# Altium PCB PCB 0901.PcbDoc (part 1 of 3)
Units mm, origin at the board's own origin, x right, y up, seen from the top; angles counter-clockwise.
Board outline 234.06 x 185.93 mm, 2 copper layers (Top Layer, Bottom Layer); 162 components, 256 nets, 1015 pads, 205 vias.
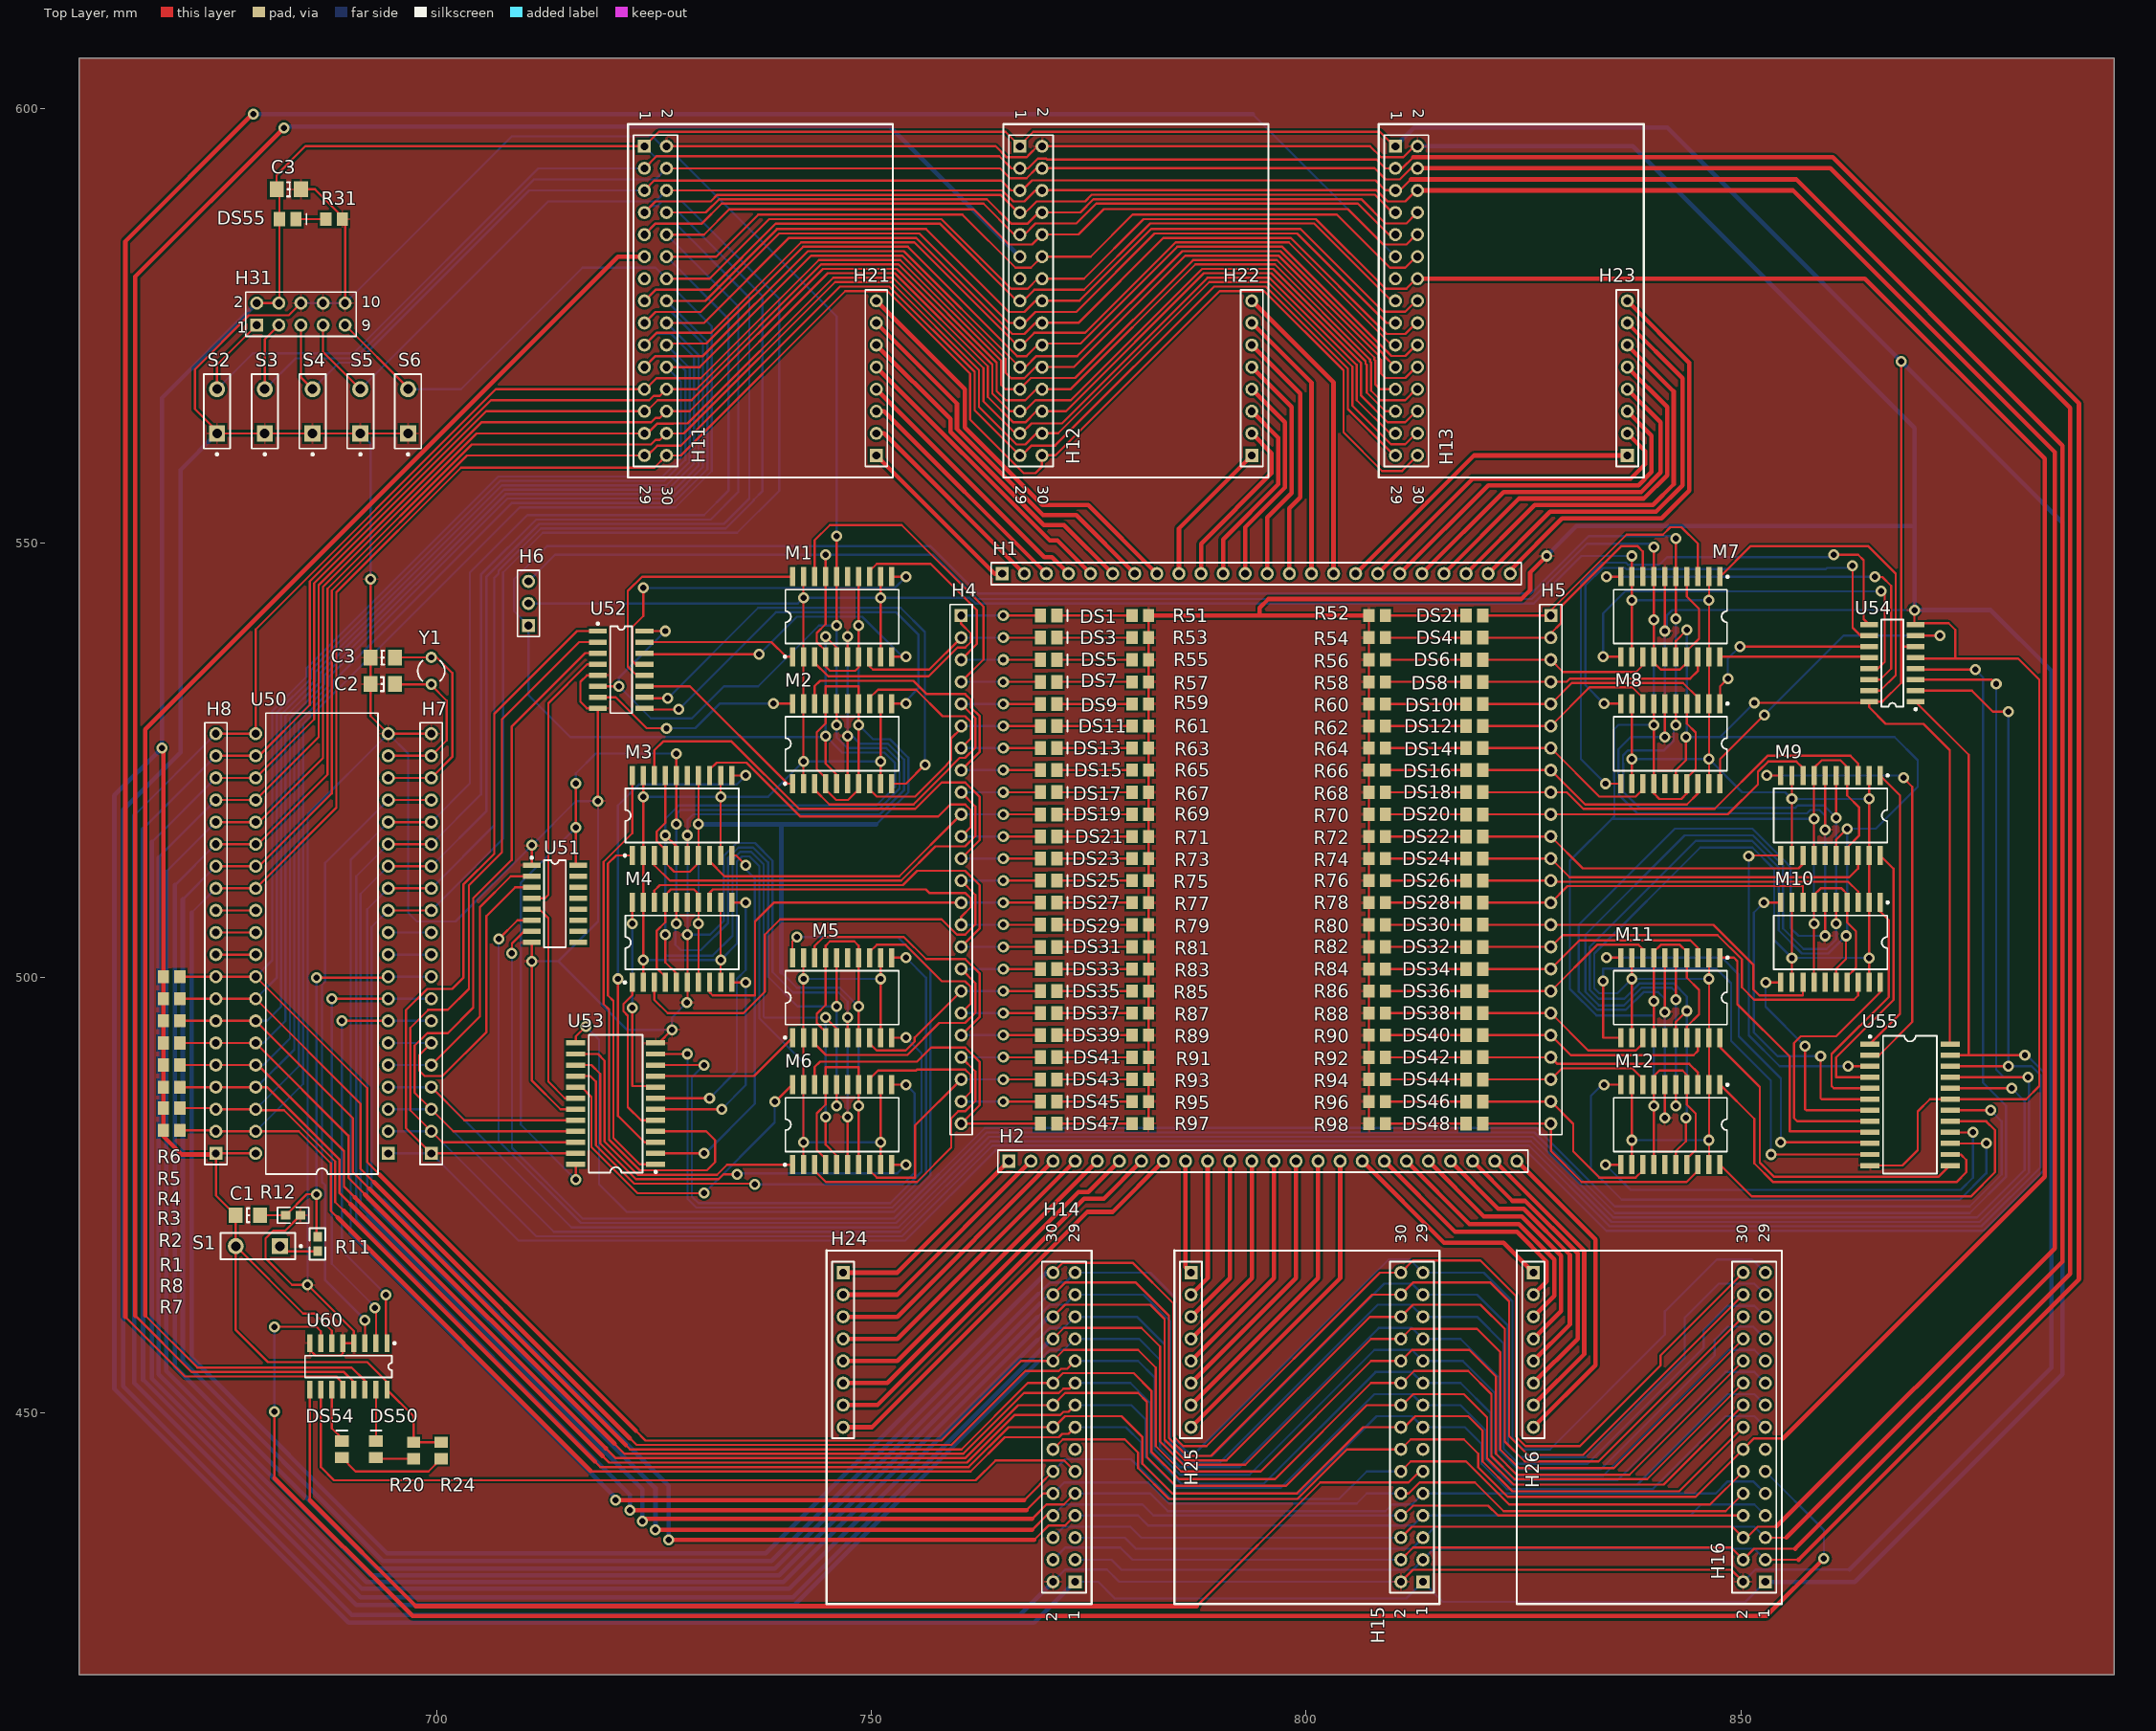
[diagram p0: Top Layer view]
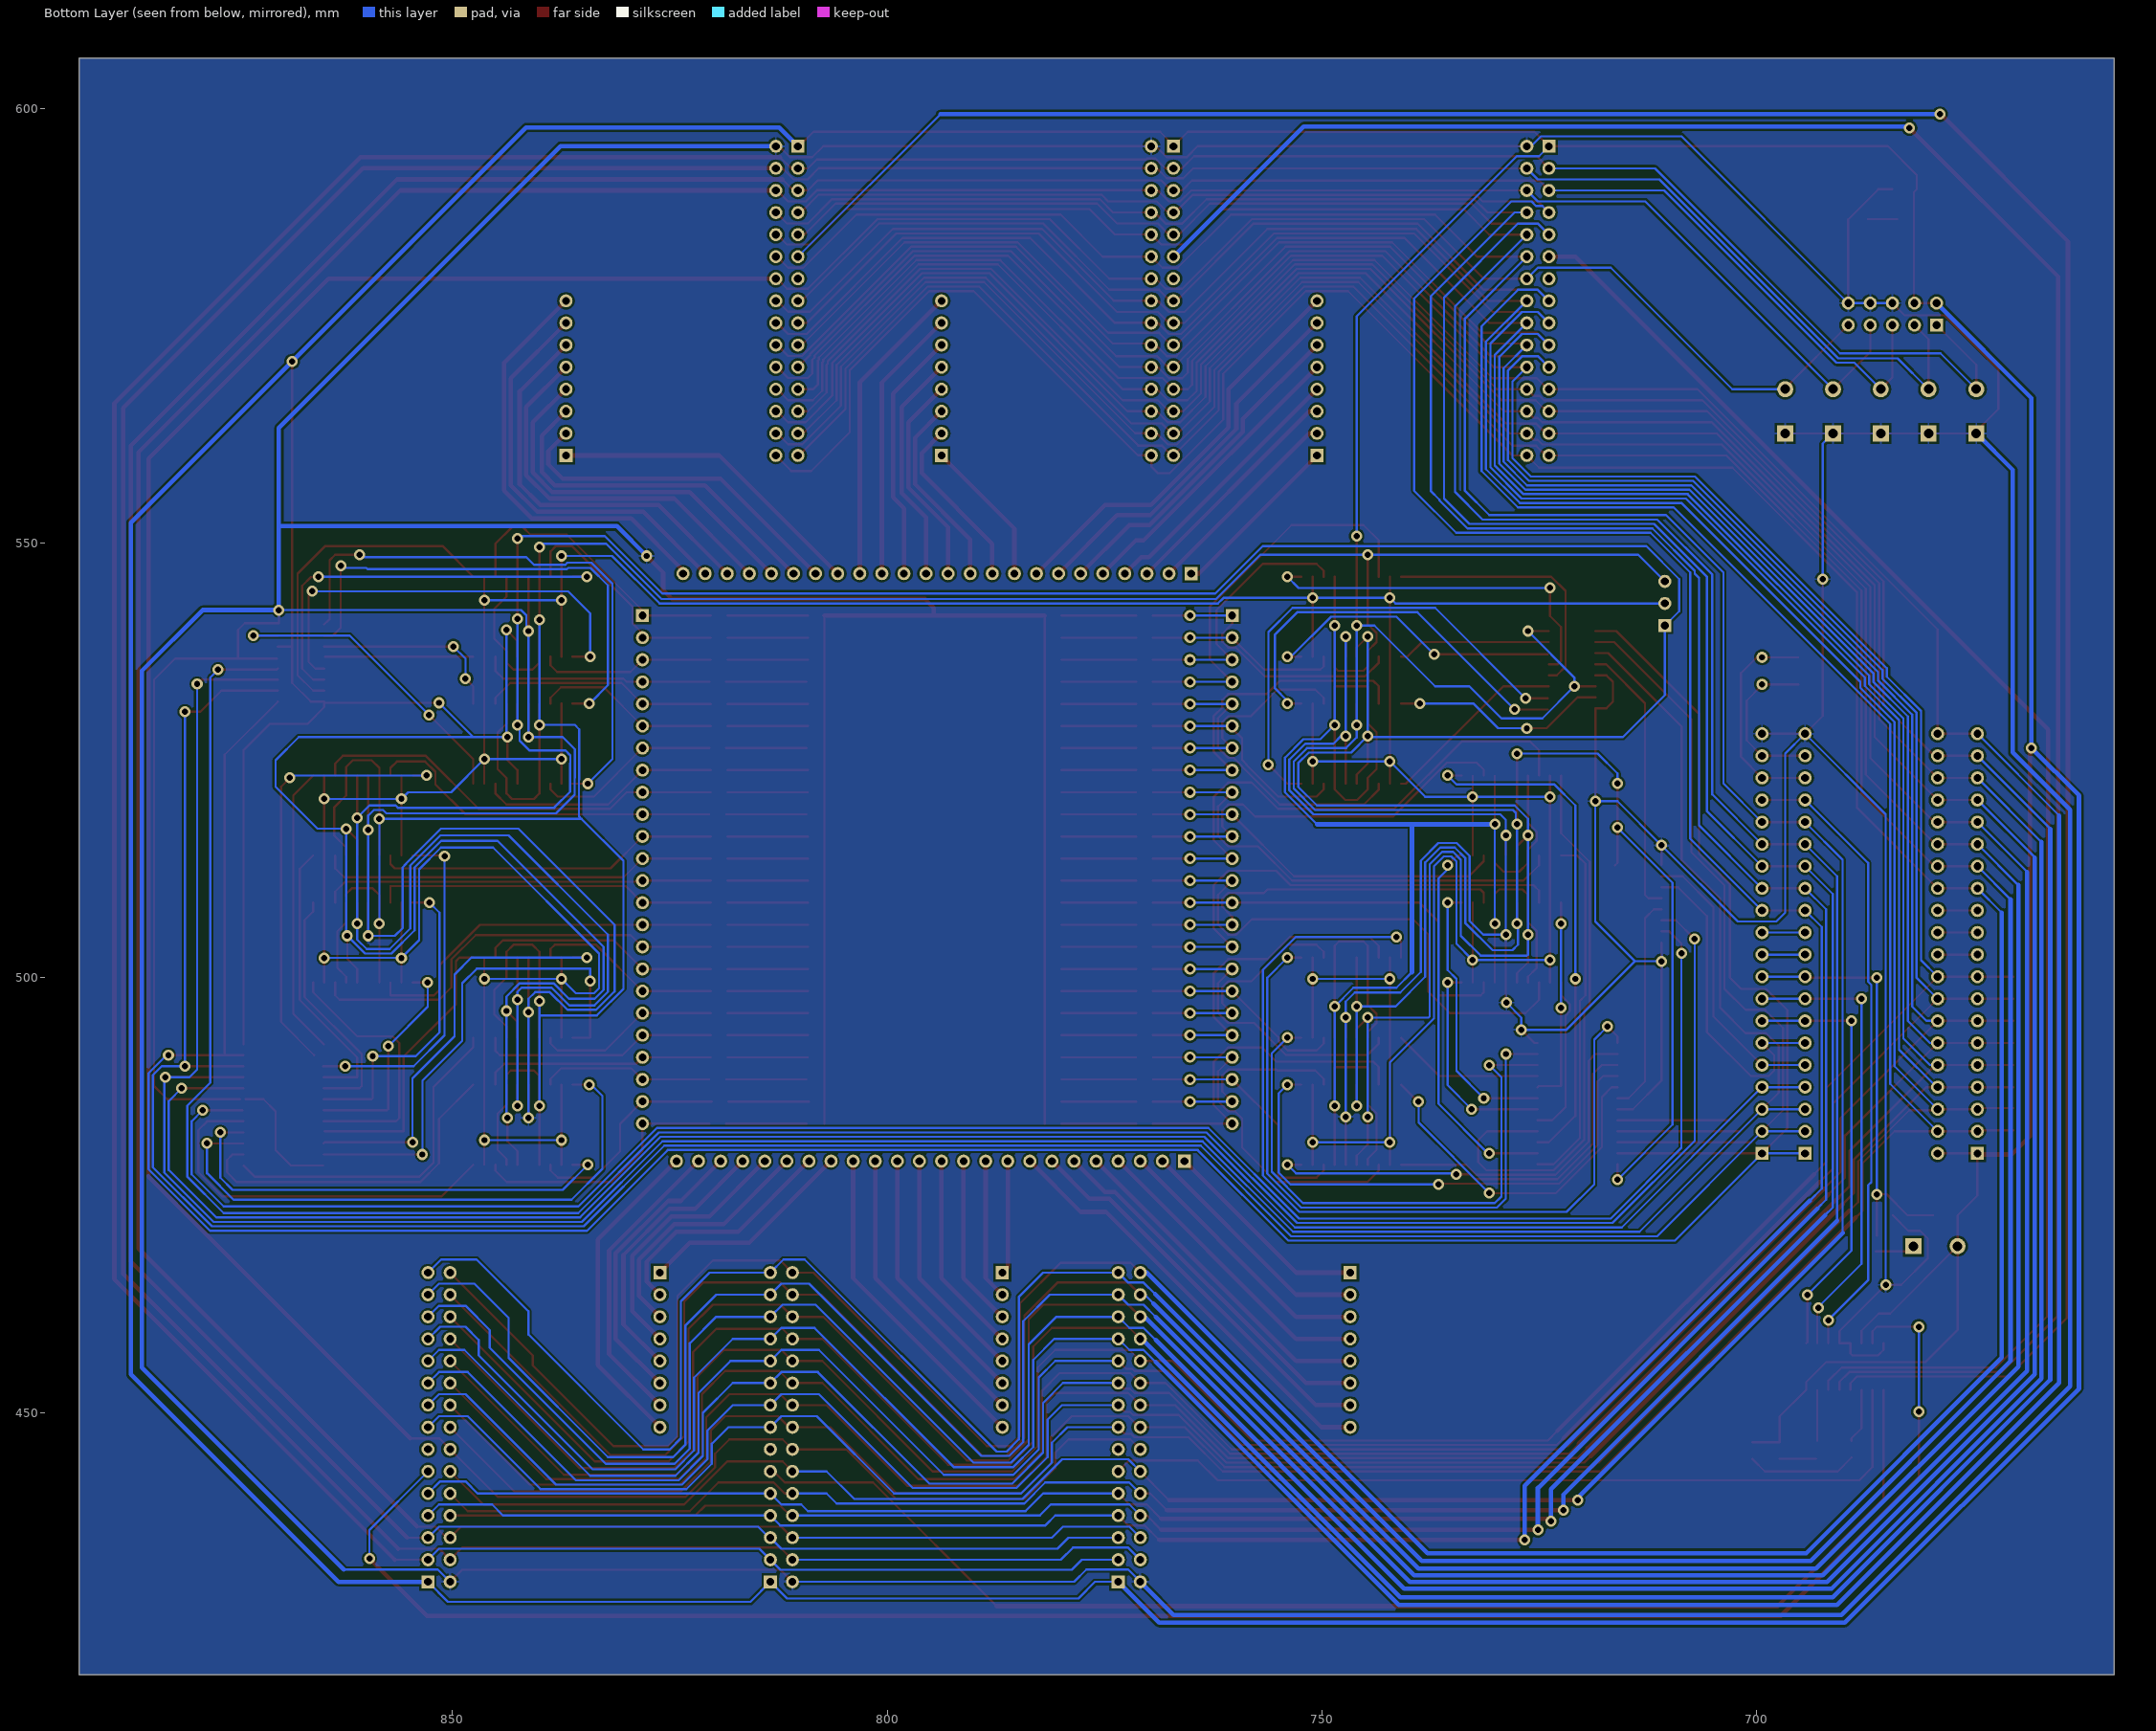
[diagram p1: Bottom Layer view, seen from below]

## Layer stack, top to bottom
Top Layer: signal copper 0.0356
Dielectric: dielectric 0.32, FR-4, Dk 4.8
Bottom Layer: signal copper 0.0356

## Board outline
658.876,419.862 658.876,605.79 892.937,605.79 892.937,419.862

## Design rules (kind name [scope] priority, off if disabled: settings)
Clearance Clearance_1 [All] p1: gap=0.254
Clearance [All] p2: gap=0.254
PolygonConnect [All] p1: connectstyle=Relief reliefconductorwidth=0.254 reliefentries=4 polygonreliefangle="90 Angle"
RoutingVias [All] p1: holewidth=0.711 width=1.27 viastyle="Through Hole" minholewidth=0.711 minwidth=1.27 maxholewidth=0.711 maxwidth=1.27
SilkscreenOverComponentPads [All] p1: minsilkscreentomaskgap=0.254
SolderMaskExpansion [All] p1: expansion=0.102
Width [All] p1: maxlimit=1.254 minlimit=0.254 preferedwidth=0.254
27 further rules are at their usual default settings.

## Components (designator, comment, footprint, x,y, rotation, side; value= is the part's Value field where it differs from the comment)
C1 "Cap Semi" CC3216-1206 678.304,472.694 r0 top
C2 "Cap Semi" CC3216-1206 693.801,533.781 r180 top
C3 "Cap Semi" CC3216-1206 683.006,590.677 r180 top
C3 "Cap Semi" CC3216-1206 693.801,536.829 r0 top
DS1 "LED3" "SMD _LED" 770.382,541.655 r180 top
DS2 "LED3" "SMD _LED" 819.343,541.655 r0 top
DS3 "LED3" "SMD _LED" 770.382,539.115 r180 top
DS4 "LED3" "SMD _LED" 819.343,539.115 r0 top
DS5 "LED3" "SMD _LED" 770.382,536.575 r180 top
DS6 "LED3" "SMD _LED" 819.343,536.575 r0 top
DS7 "LED3" "SMD _LED" 770.382,534.035 r180 top
DS8 "LED3" "SMD _LED" 819.343,534.035 r0 top
DS9 "LED3" "SMD _LED" 770.382,531.495 r180 top
DS10 "LED3" "SMD _LED" 819.343,531.495 r0 top
DS11 "LED3" "SMD _LED" 770.382,528.955 r180 top
DS12 "LED3" "SMD _LED" 819.343,528.955 r0 top
DS13 "LED3" "SMD _LED" 770.382,526.415 r180 top
DS14 "LED3" "SMD _LED" 819.343,526.415 r0 top
DS15 "LED3" "SMD _LED" 770.382,523.875 r180 top
DS16 "LED3" "SMD _LED" 819.343,523.875 r0 top
DS17 "LED3" "SMD _LED" 770.382,521.335 r180 top
DS18 "LED3" "SMD _LED" 819.343,521.335 r0 top
DS19 "LED3" "SMD _LED" 770.382,518.795 r180 top
DS20 "LED3" "SMD _LED" 819.343,518.795 r0 top
DS21 "LED3" "SMD _LED" 770.382,516.255 r180 top
DS22 "LED3" "SMD _LED" 819.343,516.255 r0 top
DS23 "LED3" "SMD _LED" 770.382,513.715 r180 top
DS24 "LED3" "SMD _LED" 819.343,513.715 r0 top
DS25 "LED3" "SMD _LED" 770.382,511.175 r180 top
DS26 "LED3" "SMD _LED" 819.343,511.175 r0 top
DS27 "LED3" "SMD _LED" 770.382,508.635 r180 top
DS28 "LED3" "SMD _LED" 819.343,508.635 r0 top
DS29 "LED3" "SMD _LED" 770.382,506.095 r180 top
DS30 "LED3" "SMD _LED" 819.343,506.095 r0 top
DS31 "LED3" "SMD _LED" 770.382,503.555 r180 top
DS32 "LED3" "SMD _LED" 819.343,503.555 r0 top
DS33 "LED3" "SMD _LED" 770.382,501.015 r180 top
DS34 "LED3" "SMD _LED" 819.343,501.015 r0 top
DS35 "LED3" "SMD _LED" 770.382,498.475 r180 top
DS36 "LED3" "SMD _LED" 819.343,498.475 r0 top
DS37 "LED3" "SMD _LED" 770.382,495.935 r180 top
DS38 "LED3" "SMD _LED" 819.343,495.935 r0 top
DS39 "LED3" "SMD _LED" 770.382,493.395 r180 top
DS40 "LED3" "SMD _LED" 819.343,493.395 r0 top
DS41 "LED3" "SMD _LED" 770.382,490.855 r180 top
DS42 "LED3" "SMD _LED" 819.343,490.855 r0 top
DS43 "LED3" "SMD _LED" 770.382,488.315 r180 top
DS44 "LED3" "SMD _LED" 819.343,488.315 r0 top
DS45 "LED3" "SMD _LED" 770.382,485.775 r180 top
DS46 "LED3" "SMD _LED" 819.343,485.775 r0 top
DS47 "LED3" "SMD _LED" 770.382,483.235 r180 top
DS48 "LED3" "SMD _LED" 819.343,483.235 r0 top
DS50 "LED3" "SMD _LED" 693.039,445.77 r270 top
DS54 "LED3" "SMD _LED" 689.102,445.77 r270 top
DS55 "LED3" "SMD _LED" 682.879,587.248 r180 top
H1 "Header 24" HDR1X24 765.048,546.481 r0 top
H2 "Header 24" HDR1X24 765.81,478.917 r0 top
H4 "Header 24" HDR1X24 760.321,541.655 r270 top
H5 "Header 24" HDR1X24 828.139,541.655 r270 top
H6 "Header 3" HDR1X3 710.565,540.512 r90 top
H7 "Header 20" HDR1X20 699.389,479.806 r90 top
H8 "Header 20" HDR1X20 674.624,479.806 r90 top
H11 "Header 15X2" HDR2X15 723.901,595.63 r270 top
H12 "Header 15X2" HDR2X15 767.081,595.63 r270 top
H13 "Header 15X2" HDR2X15 810.26,595.63 r270 top
H14 "Header 15X2" HDR2X15 773.424,430.536 r90 top
H15 "Header 15X2" HDR2X15 813.429,430.536 r90 top
H16 "Header 15X2" HDR2X15 852.799,430.536 r90 top
H21 "Header 8" HDR1X8 750.571,560.07 r90 top
H22 "Header 8" HDR1X8 793.751,560.07 r90 top
H23 "Header 8" HDR1X8 836.93,560.07 r90 top
H24 "Header 8" HDR1X8 746.754,466.096 r270 top
H25 "Header 8" HDR1X8 786.759,466.096 r270 top
H26 "Header 8" HDR1X8 826.129,466.096 r270 top
H31 "Header 5X2" HDR2X5 679.323,575.056 r0 top
M1 "MAX333ACWP" WSO20 746.633,541.528 r0 top
M2 "MAX333ACWP" WSO20 746.633,526.923 r0 top
M3 "MAX333ACWP" WSO20 728.218,518.668 r0 top
M4 "MAX333ACWP" WSO20 728.218,504.063 r0 top
M5 "MAX333ACWP" WSO20 746.633,497.713 r0 top
M6 "MAX333ACWP" WSO20 746.633,483.108 r0 top
M7 "MAX333ACWP" WSO20 841.883,541.528 r180 top
M8 "MAX333ACWP" WSO20 841.883,526.923 r180 top
M9 "MAX333ACWP" WSO20 860.298,518.668 r180 top
M10 "MAX333ACWP" WSO20 860.298,504.063 r180 top
M11 "MAX333ACWP" WSO20 841.883,497.713 r180 top
M12 "MAX333ACWP" WSO20 841.883,483.108 r180 top
R1 "Res Semi" CR2012-0805 669.544,482.473 r0 top
R2 "Res Semi" CR2012-0805 669.544,485.013 r0 top
R3 "Res Semi" CR2012-0805 669.544,487.426 r0 top
R4 "Res Semi" CR2012-0805 669.544,489.966 r0 top
R5 "Res Semi" CR2012-0805 669.544,492.506 r0 top
R6 "Res Semi" CR2012-0805 669.544,495.046 r0 top
R7 "Res Semi" CR2012-0805 669.544,497.586 r0 top
R8 "Res Semi" CR2012-0805 669.544,500.126 r0 top
R11 "Res3" C1608-0603 686.308,469.392 r90 top
R12 "Res3" C1608-0603 683.514,472.694 r180 top
R20 "Res Semi" CR2012-0805 697.357,445.643 r90 top
R24 "Res Semi" CR2012-0805 700.532,445.643 r90 top
R31 "Res Semi" CR2012-0805 688.213,587.248 r180 top
R51 "Res Semi" CR2012-0805 780.923,541.655 r0 top
R52 "Res Semi" CR2012-0805 808.167,541.655 r180 top
R53 "Res Semi" CR2012-0805 780.923,539.115 r0 top
R54 "Res Semi" CR2012-0805 808.167,539.115 r180 top
R55 "Res Semi" CR2012-0805 780.923,536.575 r0 top
R56 "Res Semi" CR2012-0805 808.167,536.575 r180 top
R57 "Res Semi" CR2012-0805 780.923,534.035 r0 top
R58 "Res Semi" CR2012-0805 808.167,534.035 r180 top
R59 "Res Semi" CR2012-0805 780.923,531.495 r0 top
R60 "Res Semi" CR2012-0805 808.167,531.495 r180 top
R61 "Res Semi" CR2012-0805 780.923,528.955 r0 top
R62 "Res Semi" CR2012-0805 808.167,528.955 r180 top
R63 "Res Semi" CR2012-0805 780.923,526.415 r0 top
R64 "Res Semi" CR2012-0805 808.167,526.415 r180 top
R65 "Res Semi" CR2012-0805 780.923,523.875 r0 top
R66 "Res Semi" CR2012-0805 808.167,523.875 r180 top
R67 "Res Semi" CR2012-0805 780.923,521.335 r0 top
R68 "Res Semi" CR2012-0805 808.167,521.335 r180 top
R69 "Res Semi" CR2012-0805 780.923,518.795 r0 top
R70 "Res Semi" CR2012-0805 808.167,518.795 r180 top
R71 "Res Semi" CR2012-0805 780.923,516.255 r0 top
R72 "Res Semi" CR2012-0805 808.167,516.255 r180 top
R73 "Res Semi" CR2012-0805 780.923,513.715 r0 top
R74 "Res Semi" CR2012-0805 808.167,513.715 r180 top
R75 "Res Semi" CR2012-0805 780.923,511.175 r0 top
R76 "Res Semi" CR2012-0805 808.167,511.175 r180 top
R77 "Res Semi" CR2012-0805 780.923,508.635 r0 top
R78 "Res Semi" CR2012-0805 808.167,508.635 r180 top
R79 "Res Semi" CR2012-0805 780.923,506.095 r0 top
R80 "Res Semi" CR2012-0805 808.167,506.095 r180 top
R81 "Res Semi" CR2012-0805 780.923,503.555 r0 top
R82 "Res Semi" CR2012-0805 808.167,503.555 r180 top
R83 "Res Semi" CR2012-0805 780.923,501.015 r0 top
R84 "Res Semi" CR2012-0805 808.167,501.015 r180 top
R85 "Res Semi" CR2012-0805 780.923,498.475 r0 top
R86 "Res Semi" CR2012-0805 808.167,498.475 r180 top
R87 "Res Semi" CR2012-0805 780.923,495.935 r0 top
R88 "Res Semi" CR2012-0805 808.167,495.935 r180 top
R89 "Res Semi" CR2012-0805 780.923,493.395 r0 top
R90 "Res Semi" CR2012-0805 808.167,493.395 r180 top
R91 "Res Semi" CR2012-0805 780.923,490.855 r0 top
R92 "Res Semi" CR2012-0805 808.167,490.855 r180 top
R93 "Res Semi" CR2012-0805 780.923,488.315 r0 top
R94 "Res Semi" CR2012-0805 808.167,488.315 r180 top
R95 "Res Semi" CR2012-0805 780.923,485.775 r0 top
R96 "Res Semi" CR2012-0805 808.167,485.775 r180 top
R97 "Res Semi" CR2012-0805 780.923,483.235 r0 top
R98 "Res Semi" CR2012-0805 808.167,483.235 r180 top
S1 "SW-PB" SPST-2 679.45,469.138 r180 top
S2 "SW-PB" SPST-2 674.751,565.15 r90 top
S3 "SW-PB" SPST-2 680.244,565.15 r90 top
S4 "SW-PB" SPST-2 685.736,565.15 r90 top
S5 "SW-PB" SPST-2 691.229,565.15 r90 top
S6 "SW-PB" SPST-2 696.722,565.15 r90 top
U50 "AT89C51" 40P6 686.816,503.936 r90 top
U51 "SN74AHC139D" D016 713.613,508.508 r270 top
U52 "SN74F138D" D016 721.233,535.432 r270 top
U53 "DM74LS154WM" M24B 720.598,485.521 r90 top
U54 "SN74F138D" D016 867.41,536.194 r90 top
U55 "DM74LS154WM" M24B 869.442,485.394 r270 top
U60 "SN74F138D" D016 689.864,455.295 r180 top
Y1 "XTAL" BCY-W2/D3.1 699.389,535.305 r0 top

## Footprints (in the part's own frame and the unit in brackets; to place one, negate y for a bottom-side part, rotate by r counter-clockwise, add the part's x,y. Pads: shape width x height; smd on the part's side, far side on the other; paste and mask are expansions set on the pad)
40P6 [mm]
  rect 1.5x1.5 hole 0.9: 1(-24.13,-7.62)
  round 1.5 hole 0.9: 2(-21.59,-7.62) 3(-19.05,-7.62) 4(-16.51,-7.62) 5(-13.97,-7.62) 6(-11.43,-7.62) 7(-8.89,-7.62) 8(-6.35,-7.62) 9(-3.81,-7.62) 10(-1.27,-7.62) 11(1.27,-7.62) 12(3.81,-7.62) 13(6.35,-7.62) 14(8.89,-7.62) 15(11.43,-7.62) 16(13.97,-7.62) 17(16.51,-7.62) 18(19.05,-7.62) 19(21.59,-7.62) 20(24.13,-7.62) 21(24.13,7.62) 22(21.59,7.62) 23(19.05,7.62) 24(16.51,7.62) 25(13.97,7.62) 26(11.43,7.62) 27(8.89,7.62) 28(6.35,7.62) 29(3.81,7.62) 30(1.27,7.62) 31(-1.27,7.62) 32(-3.81,7.62) 33(-6.35,7.62) 34(-8.89,7.62) 35(-11.43,7.62) 36(-13.97,7.62) 37(-16.51,7.62) 38(-19.05,7.62) 39(-21.59,7.62) 40(-24.13,7.62)
  silkscreen extent -26.5,-6.45 26.5,6.45
BCY-W2/D3.1 [mm] "Crystal, Thru-Hole; 2 Leads; Body 3.1 x 8.2 mm (Dia.xH)"
  round 1.3 hole 0.7: 1(0,1.55) 2(0,-1.55)
  silkscreen extent -1.55,-1.19 1.55,1.17
C1608-0603 [mm] "Chip Resistor; Body 1.6 x 0.8 mm (LxW typ)"
  rect 1.1x1 smd: 1(-0.85,0) 2(0.85,0)
  silkscreen extent -1.8,-0.9 1.8,0.9
CC3216-1206 [mm] "Chip Capacitor; Body 3.2 x 1.6 mm (LxW typ)"
  rect 1.6x1.8 smd: 1(-1.4,0) 2(1.4,0)
  silkscreen extent -0.11,-0.8 0.16,0.8
CR2012-0805 [mm] "Chip Resistor; Body 2.0 x 1.3 mm (LxW typ)"
  rect 1.3x1.5 smd: 1(-0.95,0) 2(0.95,0)
D016 [mm] "Small Outline; 16 Leads; Body Width 3.9 mm; Pitch 1.27 mm"
  rect 0.6x2.05 smd: 1(-4.445,-2.675) 2(-3.175,-2.675) 3(-1.905,-2.675) 4(-0.635,-2.675) 5(0.635,-2.675) 6(1.905,-2.675) 7(3.175,-2.675) 8(4.445,-2.675) 9(4.445,2.675) 10(3.175,2.675) 11(1.905,2.675) 12(0.635,2.675) 13(-0.635,2.675) 14(-1.905,2.675) 15(-3.175,2.675) 16(-4.445,2.675)
  silkscreen extent -5.42,-2.8 5,1.25
HDR1X3 [mm] "Connector; Header; 3 Position"
  rect 1.5x1.5 hole 0.9: 1(0,0)
  round 1.5 hole 0.9: 2(2.54,0) 3(5.08,0)
  silkscreen extent -1.27,-1.27 6.35,1.27
HDR1X8 [mm] "Connector; Header; 8 Position"
  rect 1.5x1.5 hole 0.9: 1(0,0)
  round 1.5 hole 0.9: 2(2.54,0) 3(5.08,0) 4(7.62,0) 5(10.16,0) 6(12.7,0) 7(15.24,0) 8(17.78,0)
  silkscreen extent -1.27,-1.27 19.05,1.27
HDR1X20 [mm] "Connector; Header; 20 Position"
  rect 1.5x1.5 hole 0.9: 1(0,0)
  round 1.5 hole 0.9: 2(2.54,0) 3(5.08,0) 4(7.62,0) 5(10.16,0) 6(12.7,0) 7(15.24,0) 8(17.78,0) 9(20.32,0) 10(22.86,0) 11(25.4,0) 12(27.94,0) 13(30.48,0) 14(33.02,0) 15(35.56,0) 16(38.1,0) 17(40.64,0) 18(43.18,0) 19(45.72,0) 20(48.26,0)
  silkscreen extent -1.27,-1.27 49.53,1.27
HDR1X24 [mm] "Connector; Header; 24 Position"
  rect 1.5x1.5 hole 0.9: 1(0,0)
  round 1.5 hole 0.9: 2(2.54,0) 3(5.08,0) 4(7.62,0) 5(10.16,0) 6(12.7,0) 7(15.24,0) 8(17.78,0) 9(20.32,0) 10(22.86,0) 11(25.4,0) 12(27.94,0) 13(30.48,0) 14(33.02,0) 15(35.56,0) 16(38.1,0) 17(40.64,0) 18(43.18,0) 19(45.72,0) 20(48.26,0) 21(50.8,0) 22(53.34,0) 23(55.88,0) 24(58.42,0)
  silkscreen extent -1.27,-1.27 59.69,1.27
HDR2X5 [mm] "Connector; Header; 5x2 Position"
  rect 1.5x1.5 hole 0.9: 1(0,0)
  round 1.5 hole 0.9: 2(0,2.54) 3(2.54,0) 4(2.54,2.54) 5(5.08,0) 6(5.08,2.54) 7(7.62,0) 8(7.62,2.54) 9(10.16,0) 10(10.16,2.54)
  silkscreen extent -1.27,-1.27 11.43,3.81
HDR2X15 [mm] "Connector; Header; 15x2 Position"
  rect 1.5x1.5 hole 0.9: 1(0,0)
  round 1.5 hole 0.9: 2(0,2.54) 3(2.54,0) 4(2.54,2.54) 5(5.08,0) 6(5.08,2.54) 7(7.62,0) 8(7.62,2.54) 9(10.16,0) 10(10.16,2.54) 11(12.7,0) 12(12.7,2.54) 13(15.24,0) 14(15.24,2.54) 15(17.78,0) 16(17.78,2.54) 17(20.32,0) 18(20.32,2.54) 19(22.86,0) 20(22.86,2.54) 21(25.4,0) 22(25.4,2.54) 23(27.94,0) 24(27.94,2.54) 25(30.48,0) 26(30.48,2.54) 27(33.02,0) 28(33.02,2.54) 29(35.56,0) 30(35.56,2.54)
  silkscreen extent -1.27,-1.27 36.83,3.81
M24B [mm] "Small Outline; 24 Leads; Body Width 7.5 mm; Pitch 1.27 mm"
  rect 0.6x2.2 smd: 1(-6.985,-4.6) 2(-5.715,-4.6) 3(-4.445,-4.6) 4(-3.175,-4.6) 5(-1.905,-4.6) 6(-0.635,-4.6) 7(0.635,-4.6) 8(1.905,-4.6) 9(3.175,-4.6) 10(4.445,-4.6) 11(5.715,-4.6) 12(6.985,-4.6) 13(6.985,4.6) 14(5.715,4.6) 15(4.445,4.6) 16(3.175,4.6) 17(1.905,4.6) 18(0.635,4.6) 19(-0.635,4.6) 20(-1.905,4.6) 21(-3.175,4.6) 22(-4.445,4.6) 23(-5.715,4.6) 24(-6.985,4.6)
  silkscreen extent -7.96,-4.73 7.93,3.1
"SMD _LED" [mm] "SMT LED; 2 Leads"
  rect 1.3x1.6 smd: 1(0.95,0) 2(-0.95,0)
  silkscreen extent -2.16,-0.64 -2.16,0.63
SPST-2 [mm] "Circuit Breaker; 2 Leads"
  rect 1.85x1.85 hole 1.1: 1(-2.54,0)
  round 1.85 hole 1.1: 2(2.54,0)
  silkscreen extent -5.08,-1.52 4.28,1.52
WSO20 [mm] "Small Outline; 20 Leads; Body Width 7.5 mm; Pitch 1.27 mm"
  rect 0.6x2.2 smd: 1(-5.715,-4.6) 2(-4.445,-4.6) 3(-3.175,-4.6) 4(-1.905,-4.6) 5(-0.635,-4.6) 6(0.635,-4.6) 7(1.905,-4.6) 8(3.175,-4.6) 9(4.445,-4.6) 10(5.715,-4.6) 11(5.715,4.6) 12(4.445,4.6) 13(3.175,4.6) 14(1.905,4.6) 15(0.635,4.6) 16(-0.635,4.6) 17(-1.905,4.6) 18(-3.175,4.6) 19(-4.445,4.6) 20(-5.715,4.6)
  silkscreen extent -6.69,-4.72 6.53,3.1

## Part data
C1 C2 C3 C3: "Capacitor (Semiconductor SIM Model)"
DS1 DS2 DS3 DS4 DS5 DS6 DS7 DS8 DS9 DS10 DS11 DS12 DS13 DS14 DS15 DS16 DS17 DS18 DS19 DS20 DS21 DS22 DS23 DS24 DS25 DS26 DS27 DS28 DS29 DS30 DS31 DS32 DS33 DS34 DS35 DS36 DS37 DS38 DS39 DS40 DS41 DS42 DS43 DS44 DS45 DS46 DS47 DS48 DS50 DS54 DS55: "Typical BLUE SiC LED"
H1 H2 H4 H5: "Header, 24-Pin"
H6: "Header, 3-Pin"
H7 H8: "Header, 20-Pin"
H11 H12 H13 H14 H15 H16: "Header, 15-Pin, Dual row"
H21 H22 H23 H24 H25 H26: "Header, 8-Pin"
H31: "Header, 5-Pin, Dual row"
M1 M2 M3 M4 M5 M6 M7 M8 M9 M10 M11 M12: "Precision, Quad, SPDT, CMOS Analog Switch"
R1 R2 R3 R4 R5 R6 R7 R8 R20 R24 R31 R51 R52 R53 R54 R55 R56 R57 R58 R59 R60 R61 R62 R63 R64 R65 R66 R67 R68 R69 R70 R71 R72 R73 R74 R75 R76 R77 R78 R79 R80 R81 R82 R83 R84 R85 R86 R87 R88 R89 R90 R91 R92 R93 R94 R95 R96 R97 R98: "Semiconductor Resistor"
R11 R12: "Resistor"
S1 S2 S3 S4 S5 S6: "Switch"
U50: library part AT8, "8-Bit Microcontroller with 4K Flash"
U51: "Dual 2-Line to 4-Line Decoder / Demultiplexer"
U52 U54 U60: "3-Line to 8-Line Decoder / Demultiplexer"
U53 U55: "4-Line to 16-Line Decoder/Demultiplexer"
Y1: "Crystal Oscillator"

## Via types
v1: diameter 1.27, hole 0.711, Top Layer to Bottom Layer, 205 vias

## Nets (pads, with @x,y where several pads share a name; then routed paths per layer and width w, separated by ;. In a path a pad name is that pad's centre, name@x,y a point inside that pad or via, vN(x,y) a via of type N, cw(c..) or ccw(c..) an arc to the next point about the centre after c; other vN are vias at no path point)
COM1: DS1.1 H4.1 M1.3 | length 33.6
  Top Layer w0.254: M1.3@743.458,536.928 743.458,536.259 745.047,534.67 756.594,534.67 759.908,537.984 760.789,537.984 761.452,538.647 761.452,539.583 760.321,540.714 H4.1@760.321,541.655 ; v1(765.175,541.655) DS1.1@769.432,541.655
  Bottom Layer w0.254: H4.1@760.321,541.655 v1(765.175,541.655)
COM2: DS2.1 H5.1 M7.3 | length 33.9
  Top Layer w0.254: DS2.1@820.293,541.655 H5.1@828.139,541.655 828.139,542.262 836.843,550.966 841.034,550.966 841.883,551.815 843.153,551.815 845.058,549.91 M7.3@845.058,546.128
COM3: DS3.1 H4.2 M1.8 | length 22.4
  Top Layer w0.254: M1.8@749.808,536.928 749.808,535.813 750.174,535.447 756.653,535.447 H4.2@760.321,539.115 ; v1(765.175,539.115) DS3.1@769.432,539.115
  Bottom Layer w0.254: H4.2@760.321,539.115 v1(765.175,539.115)
COM4: DS4.1 H5.2 M7.8 | length 27.4
  Top Layer w0.254: DS4.1@820.293,539.115 H5.2@828.139,539.115 828.139,539.616 829.27,540.747 829.27,542.675 836.251,549.656 838.073,549.656 838.708,549.021 M7.8@838.708,546.128
COM5: DS5.1 H4.3 M1.13 | length 31.1
  Top Layer w0.254: M1.13@749.808,546.128 749.808,546.797 750.62,547.609 756.808,547.609 762.127,542.29 762.127,538.381 H4.3@760.321,536.575 ; v1(765.175,536.575) DS5.1@769.432,536.575
  Bottom Layer w0.254: H4.3@760.321,536.575 v1(765.175,536.575)
COM6: DS6.1 H5.3 M7.13 | length 20.3
  Top Layer w0.254: DS6.1@820.293,536.575 H5.3@828.139,536.575 829.536,535.178 837.946,535.178 838.708,535.94 M7.13@838.708,536.928
COM7: DS7.1 H4.4 M1.18 | length 47
  Top Layer w0.254: M1.18@743.458,546.128 743.458,550.291 745.236,552.069 753.491,552.069 762.889,542.671 762.889,536.603 H4.4@760.321,534.035 ; v1(765.175,534.035) DS7.1@769.432,534.035
  Bottom Layer w0.254: H4.4@760.321,534.035 v1(765.175,534.035)
COM8: DS8.1 H5.4 M7.18 | length 26.9
  Top Layer w0.254: DS8.1@820.42,534.035 H5.4@828.266,534.035 ; H5.4@828.139,534.035 829.961,534.035 830.342,534.416 844.169,534.416 845.058,535.305 M7.18@845.058,536.928
COM9: DS9.1 H4.5 M2.3 | length 37.4
  Top Layer w0.254: M2.3@743.458,522.323 743.458,521.654 745.174,519.938 754.844,519.938 759.19,524.284 759.19,524.343 760.131,525.284 760.789,525.284 761.96,526.455 761.96,529.856 H4.5@760.321,531.495 ; v1(765.175,531.495) DS9.1@769.432,531.495
  Bottom Layer w0.254: H4.5@760.321,531.495 v1(765.175,531.495)
COM10: DS10.1 H5.5 M8.3 | length 27.1
  Top Layer w0.254: DS10.1@820.293,531.495 H5.5@828.139,531.495 830.552,533.908 843.342,533.908 845.058,532.192 M8.3@845.058,531.523
COM11: DS11.1 H4.6 M2.8 | length 25.6
  Top Layer w0.254: M2.8@749.808,522.323 749.808,521.654 750.62,520.842 755.03,520.842 758.682,524.494 758.682,524.554 759.19,525.062 759.19,527.546 760.321,528.677 H4.6@760.321,528.955 ; v1(765.175,528.955) DS11.1@769.432,528.955
  Bottom Layer w0.254: H4.6@760.321,528.955 v1(765.175,528.955)
COM12: DS12.1 H5.6 M8.8 | length 21.4
  Top Layer w0.254: DS12.1@820.293,528.955 H5.6@828.139,528.955 832.584,533.4 837.5,533.4 838.708,532.192 M8.8@838.708,531.523
COM13: DS13.1 H4.7 M2.13 | length 26.8
  Top Layer w0.254: M2.13@749.808,531.523 749.808,532.192 750.762,533.146 755.142,533.146 758.202,530.086 760.789,530.086 761.452,529.423 761.452,527.546 H4.7@760.321,526.415 ; v1(765.175,526.415) DS13.1@769.432,526.415
  Bottom Layer w0.254: H4.7@760.321,526.415 v1(765.175,526.415)
COM14: DS14.1 H5.7 M8.13 | length 21.7
  Top Layer w0.254: DS14.1@820.42,526.415 H5.7@828.266,526.415 ; H5.7@828.139,526.415 833.712,520.842 837.896,520.842 838.708,521.654 M8.13@838.708,522.323
COM15: DS15.1 H4.8 M2.18 | length 39.7
  Top Layer w0.254: M2.18@743.458,531.523 743.458,533.527 744.093,534.162 754.844,534.162 756.38,532.626 760.789,532.626 761.452,531.963 761.452,531.082 762.468,530.066 762.468,526.022 H4.8@760.321,523.875 ; v1(765.175,523.875) DS15.1@769.432,523.875
  Bottom Layer w0.254: H4.8@760.321,523.875 v1(765.175,523.875)
COM16: DS16.1 H5.8 M8.18 | length 28
  Top Layer w0.254: DS16.1@820.293,523.875 H5.8@828.139,523.875 832.076,519.938 843.788,519.938 845.058,521.208 M8.18@845.058,522.323
COM17: DS17.1 H4.9 M3.3 | length 55.7
  Top Layer w0.254: M3.3@725.043,514.068 725.043,512.953 726.821,511.175 753.419,511.175 757.368,515.124 760.789,515.124 761.96,516.295 761.96,519.696 H4.9@760.321,521.335 ; v1(765.175,521.335) DS17.1@769.432,521.335
  Bottom Layer w0.254: H4.9@760.321,521.335 v1(765.175,521.335)
COM18: DS18.1 H5.9 M9.3 | length 48.2
  Top Layer w0.254: DS18.1@820.293,521.335 H5.9@828.139,521.335 829.961,521.335 831.866,519.43 846.967,519.43 853.063,525.526 862.584,525.526 863.473,524.637 M9.3@863.473,523.268
COM19: DS19.1 H4.10 M3.8 | length 42.4
  Top Layer w0.254: M3.8@731.393,514.068 731.393,513.399 733.109,511.683 753.209,511.683 H4.10@760.321,518.795 ; v1(765.175,518.795) DS19.1@769.432,518.795
  Bottom Layer w0.254: H4.10@760.321,518.795 v1(765.175,518.795)
COM20: DS20.1 H5.10 M9.8 | length 41.4
  Top Layer w0.254: DS20.1@820.42,518.795 H5.10@828.266,518.795 ; H5.10@828.139,518.795 848.487,518.795 851.944,522.252 851.944,523.689 853.146,524.891 856.361,524.891 857.123,524.129 M9.8@857.123,523.268
COM21: DS21.1 H4.11 M3.13 | length 47.1
  Top Layer w0.254: M3.13@731.393,523.268 731.393,523.937 732.205,524.749 735.643,524.749 741.851,518.541 757.676,518.541 759.061,519.926 760.789,519.926 761.452,519.263 761.452,517.386 H4.11@760.321,516.255 ; v1(765.175,516.255) DS21.1@769.432,516.255
  Bottom Layer w0.254: H4.11@760.321,516.255 v1(765.175,516.255)
COM22: DS22.1 H5.11 M9.13 | length 39.5
  Top Layer w0.254: DS22.1@820.293,516.255 H5.11@828.139,516.255 831.807,512.587 856.63,512.587 857.123,513.08 M9.13@857.123,514.068
COM23: DS23.1 H4.12 M3.18 | length 63
  Top Layer w0.254: M3.18@725.043,523.268 725.043,526.161 726.059,527.177 733.933,527.177 741.68,519.43 755.055,519.43 758.091,522.466 760.789,522.466 762.468,520.787 762.468,515.862 H4.12@760.321,513.715 ; v1(765.175,513.715) DS23.1@769.432,513.715
  Bottom Layer w0.254: H4.12@760.321,513.715 v1(765.175,513.715)
COM24: DS24.1 H5.12 M9.18 | length 46
  Top Layer w0.254: DS24.1@820.293,513.715 H5.12@828.139,513.715 830.298,511.556 862.457,511.556 863.473,512.572 M9.18@863.473,514.068
COM25: DS25.1 H4.13 M4.3 | length 63.9
  Top Layer w0.254: M4.3@725.043,499.463 725.043,497.459 726.567,495.935 735.286,495.935 737.743,498.392 737.743,504.952 739.521,506.73 758.087,506.73 759.853,504.964 760.789,504.964 761.96,506.135 761.96,509.536 H4.13@760.321,511.175 ; v1(765.175,511.175) DS25.1@769.432,511.175
  Bottom Layer w0.254: H4.13@760.321,511.175 v1(765.175,511.175)
COM26: DS26.1 H5.13 M10.3 | length 44.9
  Top Layer w0.254: DS26.1@820.293,511.175 H5.13@828.139,511.175 828.266,511.048 862.33,511.048 863.473,509.905 M10.3@863.473,508.663
COM27: DS27.1 H4.14 M4.8 | length 48.7
  Top Layer w0.254: M4.8@731.393,499.463 731.393,498.348 731.759,497.982 736.615,497.982 736.615,506.491 738.759,508.635 H4.14@760.321,508.635 ; v1(765.175,508.635) DS27.1@769.432,508.635
  Bottom Layer w0.254: H4.14@760.321,508.635 v1(765.175,508.635)
COM28: DS28.1 H5.14 M10.8 | length 39.5
  Top Layer w0.254: DS28.1@820.293,508.635 H5.14@828.139,508.635 830.044,510.54 857.123,510.54 M10.8@857.123,508.663
COM29: DS29.1 H4.15 M4.13 | length 44.4
  Top Layer w0.254: M4.13@731.393,508.663 731.393,509.778 731.774,510.159 756.257,510.159 756.65,509.766 760.789,509.766 761.452,509.103 761.452,508.167 760.321,507.036 H4.15@760.321,506.095 ; v1(765.175,506.095) DS29.1@769.432,506.095
  Bottom Layer w0.254: H4.15@760.321,506.095 v1(765.175,506.095)
COM30: DS30.1 H5.15 M10.13 | length 43.3
  Top Layer w0.254: DS30.1@820.293,506.095 H5.15@828.139,506.095 846.836,506.095 851.408,501.523 851.408,498.701 852.127,497.982 857.123,497.982 M10.13@857.123,499.463
COM31: DS31.1 H4.16 M4.18 | length 57.5
  Top Layer w0.254: M4.18@725.043,508.663 725.043,510.032 725.678,510.667 753.63,510.667 755.269,512.306 760.789,512.306 762.468,510.627 762.468,505.702 H4.16@760.321,503.555 ; v1(765.175,503.555) DS31.1@769.432,503.555
  Bottom Layer w0.254: H4.16@760.321,503.555 v1(765.175,503.555)
COM32: DS32.1 H5.16 M10.18 | length 50.4
  Top Layer w0.254: DS32.1@820.293,503.555 H5.16@828.139,503.555 829.493,504.909 847.304,504.909 850.095,502.118 850.095,498.899 851.52,497.474 862.98,497.474 863.473,497.967 M10.18@863.473,499.463
COM33: DS33.1 H4.17 M5.3 | length 36.6
  Top Layer w0.254: M5.3@743.458,493.113 743.458,492.444 744.778,491.124 754.137,491.124 757.817,494.804 760.789,494.804 761.96,495.975 761.96,499.376 H4.17@760.321,501.015 ; v1(765.175,501.015) DS33.1@769.432,501.015
  Bottom Layer w0.254: H4.17@760.321,501.015 v1(765.175,501.015)
COM34: DS34.1 H5.17 M11.3 | length 27.6
  Top Layer w0.254: DS34.1@820.293,501.015 H5.17@828.139,501.015 831.441,504.317 844.169,504.317 845.058,503.428 M11.3@845.058,502.313
COM35: DS35.1 H4.18 M5.8 | length 23.7
  Top Layer w0.254: M5.8@749.808,493.113 749.808,492.444 750.62,491.632 753.927,491.632 754.987,492.692 754.987,493.141 H4.18@760.321,498.475 ; v1(765.175,498.475) DS35.1@769.432,498.475
  Bottom Layer w0.254: H4.18@760.321,498.475 v1(765.175,498.475)
COM36: DS36.1 H5.18 M11.8 | length 21.8
  Top Layer w0.254: DS36.1@820.293,498.475 H5.18@828.139,498.475 833.458,503.794 838.215,503.794 838.708,503.301 M11.8@838.708,502.313
COM37: DS37.1 H4.19 M5.13 | length 27.2
  Top Layer w0.254: M5.13@749.808,502.313 749.808,502.982 750.62,503.794 753.927,503.794 758.115,499.606 760.789,499.606 761.452,498.943 761.452,497.066 H4.19@760.321,495.935 ; v1(765.175,495.935) DS37.1@769.432,495.935
  Bottom Layer w0.254: H4.19@760.321,495.935 v1(765.175,495.935)
COM38: DS38.1 H5.19 M11.13 | length 21.2
  Top Layer w0.254: DS38.1@820.293,495.935 H5.19@828.139,495.935 832.442,491.632 837.896,491.632 838.708,492.444 M11.13@838.708,493.113
COM39: DS39.1 H4.20 M5.18 | length 39.6
  Top Layer w0.254: M5.18@743.458,502.313 743.458,503.638 744.518,504.698 753.741,504.698 756.293,502.146 760.789,502.146 762.468,500.467 762.468,495.542 H4.20@760.321,493.395 ; v1(765.175,493.395) DS39.1@769.432,493.395
  Bottom Layer w0.254: H4.20@760.321,493.395 v1(765.175,493.395)
COM40: DS40.1 H5.20 M11.18 | length 27.4
  Top Layer w0.254: DS40.1@820.293,493.395 H5.20@828.139,493.395 830.425,491.109 844.55,491.109 845.058,491.617 M11.18@845.058,493.113
COM41: DS41.1 H4.21 M6.3 | length 40.4
  Top Layer w0.254: M6.3@743.458,478.508 743.458,477.839 744.778,476.519 755.24,476.519 759.19,480.469 759.19,483.846 759.988,484.644 760.789,484.644 761.96,485.815 761.96,489.216 H4.21@760.321,490.855 ; v1(765.175,490.855) DS41.1@769.432,490.855
  Bottom Layer w0.254: H4.21@760.321,490.855 v1(765.175,490.855)
COM42: DS42.1 H5.21 M12.3 | length 26.9
  Top Layer w0.254: DS42.1@820.293,490.855 H5.21@828.139,490.855 828.901,490.093 844.042,490.093 845.058,489.077 M12.3@845.058,487.708
COM43: DS43.1 H4.22 M6.8 | length 28.8
  Top Layer w0.254: M6.8@749.808,478.508 749.808,477.839 750.62,477.027 755.03,477.027 755.03,483.024 H4.22@760.321,488.315 ; v1(765.175,488.315) DS43.1@769.432,488.315
  Bottom Layer w0.254: H4.22@760.321,488.315 v1(765.175,488.315)
COM44: DS44.1 H5.22 M12.8 | length 20.1
  Top Layer w0.254: DS44.1@820.42,488.315 H5.22@828.266,488.315 ; H5.22@828.139,488.315 829.409,489.585 837.5,489.585 838.708,488.377 M12.8@838.708,487.708
COM45: DS45.1 H4.23 M6.13 | length 25.6
  Top Layer w0.254: M6.13@749.808,487.708 749.808,488.377 750.762,489.331 755.142,489.331 755.257,489.446 760.789,489.446 761.452,488.783 761.452,486.906 H4.23@760.321,485.775 ; v1(765.175,485.775) DS45.1@769.432,485.775
  Bottom Layer w0.254: H4.23@760.321,485.775 v1(765.175,485.775)
COM46: DS46.1 H5.23 M12.13 | length 24.9
  Top Layer w0.254: DS46.1@820.166,485.775 H5.23@828.012,485.775 ; H5.23@828.139,485.775 830.707,483.207 830.707,480.032 833.712,477.027 837.896,477.027 838.708,477.839 M12.13@838.708,478.508
COM47: DS47.1 H4.24 M6.18 | length 39.7
  Top Layer w0.254: M6.18@743.458,487.708 743.458,489.712 744.093,490.347 755.237,490.347 756.876,491.986 760.789,491.986 762.468,490.307 762.468,485.382 H4.24@760.321,483.235 DS47.1@769.432,483.235
COM48: DS48.1 H5.24 M12.18 | length 30.6
  Top Layer w0.254: DS48.1@820.42,483.235 H5.24@828.266,483.235 ; H5.24@828.139,483.235 828.139,480.06 831.68,476.519 843.738,476.519 845.058,477.839 M12.18@845.058,478.508
CS1: H11.11 U60.14 | length 176.7
  Top Layer w0.254: 666.496,461.177 672.505,455.168 690.245,455.168 691.769,453.644 U60.14@691.769,452.62
  Top Layer w0.508: 666.496,461.177 666.496,528.574 720.852,582.93 H11.11@723.901,582.93
CS2: H12.11 U60.13 | length 263.9
  Top Layer w0.254: 665.353,461.137 671.83,454.66 689.356,454.66 690.499,453.517 U60.13@690.499,452.62
  Top Layer w0.508: 665.353,461.137 665.353,580.644 v1(682.434,597.726)
  Bottom Layer w0.508: v1@682.371,597.662 682.625,597.916 752.095,597.916 H12.11@767.081,582.93
CS3: H13.11 U60.12 | length 311.5
  Top Layer w0.254: 664.21,461.01 671.068,454.152 688.467,454.152 689.229,453.39 U60.12@689.229,452.62
  Top Layer w0.508: 664.21,461.01 664.21,584.708 v1@678.815,599.313
  Bottom Layer w0.254: 793.877,599.313 H13.11@810.26,582.93
  Bottom Layer w0.508: v1@678.815,599.313 793.877,599.313
  other v1: 678.942,599.313
CS4: H14.11 U60.10 | length 97.7
  Top Layer w0.254: U60.10@686.689,452.62 686.689,443.738 688.213,442.214 762,442.214 764.286,444.5 772.16,444.5 H14.11@773.424,443.236
CS5: H15.11 U60.9 | length 152.2
  Top Layer w0.254: 685.419,439.928 U60.9@685.419,452.62 ; 787.4,427.736 801.624,441.96 811.784,441.96 813.06,443.236 H15.11@813.429,443.236
  Top Layer w0.508: 685.419,439.928 697.611,427.736 787.4,427.736
CS6: H16.11 U60.7 | length 224.7
  Top Layer w0.254: 681.355,442.468 v1(681.355,450.088) ; v1(681.355,459.867) 686.181,459.867 686.689,459.359 U60.7@686.689,457.97
  Top Layer w0.508: 681.355,442.468 697.23,426.593 852.932,426.593 v1(859.536,433.197)
  Bottom Layer w0.254: v1(681.355,450.088) v1(681.355,459.867) ; H16.11@852.799,443.236 859.536,436.499 v1(859.536,433.197)
FRST: H11.14 H12.14 H13.14 H14.14 H15.14 H16.14 H31.9 S6.2 | length 449.4
  Top Layer w0.254: H31.9@689.483,575.056 696.722,567.817 S6.2@696.722,567.69 ; H11.14@726.441,580.39 731.393,580.39 738.251,587.248 758.063,587.248 766.064,579.247 767.969,579.247 769.112,580.39 H12.14@769.621,580.39 ; H12.14@769.494,580.402 774.446,580.402 781.304,587.26 801.116,587.26 809.117,579.259 811.531,579.259 H13.14@812.674,580.402 ; H14.14@770.884,445.776 770.896,445.776 772.033,446.913 779.145,446.913 780.669,445.389 780.669,443.611 784.225,440.055 799.001,440.055 804.722,445.776 H15.14@810.889,445.776 812.025,446.913 818.134,446.913 819.785,445.262 819.785,443.694 823.17,440.309 844.791,440.309 H16.14@850.259,445.776 851.522,447.04 854.837,447.04
  Top Layer w0.508: H13.14@812.8,580.39 864.235,580.39 884.936,559.689 884.936,477.139 854.837,447.04
  Bottom Layer w0.254: S6.2@696.722,567.69 702.818,567.69 716.788,581.66 725.171,581.66 H11.14@726.441,580.39
GND: C2.2 C3.1 H7.20 H11.2 H12.2 H13.2 H14.2 H15.2 H16.2 H31.6 H31.8 H31.10 M1.6 M2.6 M3.6 M4.6 M5.6 M6.6 M7.6 M8.6 M9.6 M10.6 M11.6 M12.6 R12.1 R31.1 R51.2 R52.2 R53.2 R54.2 R55.2 R56.2 R57.2 R58.2 R59.2 R60.2 R61.2 R62.2 R63.2 R64.2 R65.2 R66.2 R67.2 R68.2 R69.2 R70.2 R71.2 R72.2 R73.2 R74.2 R75.2 R76.2 R77.2 R78.2 R79.2 R80.2 R81.2 R82.2 R83.2 R84.2 R85.2 R86.2 R87.2 R88.2 R89.2 R90.2 R91.2 R92.2 R93.2 R94.2 R95.2 R96.2 R97.2 R98.2 S2.1 S3.1 S4.1 S5.1 S6.1 U50.20 U51.1 U51.8 U52.5 U52.8 U53.12 U53.19 U54.5 U54.8 U55.12 U55.19 U60.4 U60.5 U60.8 | length 1690.1
  Top Layer w0.254: R12.1@684.364,472.694 682.586,470.916 681.228,470.916 680.339,470.027 680.339,467.741 683.387,464.693 v1(685.165,464.693) 690.499,459.359 U60.4@690.499,457.97 U60.5@689.229,457.97 689.229,456.819 688.974,456.564 686.055,456.564 685.419,457.2 U60.8@685.419,457.97 ; H31.6@684.403,577.596 682.994,576.187 678.415,576.187 672.211,569.983 672.211,565.404 674.751,562.864 S2.1@674.751,562.61 S3.1@680.244,562.61 S4.1@685.736,562.61 S5.1@691.229,562.61 S6.1@696.722,562.61 ; C3.1@684.406,590.677 686.015,590.677 689.483,587.209 H31.10@689.483,577.596 ; v1(692.404,545.846) 692.401,545.843 C3.1@692.401,536.829 C2.2@692.401,533.781 692.404,533.778 692.404,530.098 U50.20@694.436,528.066 H7.20@699.389,528.066 ; U51.8@710.938,504.063 v1(710.938,501.904) 710.938,488.196 714.248,484.886 U53.19@715.998,484.886 ; U51.1@710.946,512.961 v1(710.946,515.239) ; v1@718.558,520.327 U52.8@718.558,530.987 717.296,530.987 716.534,531.749 716.534,534.035 717.296,534.797 U52.5@718.558,534.797 ; U53.12@725.198,492.506 725.551,492.506 v1(727.075,494.03) ; H11.2@726.441,595.63 764.286,595.63 765.556,594.36 767.85,594.36 768.212,594.722 768.212,594.73 769.112,595.63 H12.2@769.621,595.63 ; v1@728.853,497.078 M4.6@728.853,499.463 v1(728.853,504.952) ; M3.6@728.853,514.068 v1(728.853,516.382) ; M6.6@747.268,478.508 v1(747.268,483.997) ; M5.6@747.268,493.113 v1(747.268,495.427) ; M2.6@747.268,522.323 v1(747.268,527.812) ; M1.6@747.268,536.928 v1(747.268,539.242) ; H12.2@769.494,595.642 807.339,595.642 808.609,594.372 811.161,594.372 812.431,595.642 H13.2@812.674,595.642 ; R97.2@781.873,483.235 R95.2@781.873,485.775 R93.2@781.873,488.315 R91.2@781.873,490.855 R89.2@781.873,493.395 R87.2@781.873,495.935 R85.2@781.873,498.475 R83.2@781.873,501.015 R81.2@781.873,503.555 R79.2@781.873,506.095 R77.2@781.873,508.635 R75.2@781.873,511.175 R73.2@781.873,513.715 R71.2@781.873,516.255 R69.2@781.873,518.795 R67.2@781.873,521.335 R65.2@781.873,523.875 R63.2@781.873,526.415 R61.2@781.873,528.955 R59.2@781.873,531.495 R57.2@781.873,534.035 R55.2@781.873,536.575 R53.2@781.873,539.115 R51.2@781.873,541.655 ; R98.2@807.217,483.235 R96.2@807.217,485.775 R94.2@807.217,488.315 R92.2@807.217,490.855 R90.2@807.217,493.395 R88.2@807.217,495.935 R86.2@807.217,498.475 R84.2@807.217,501.015 R82.2@807.217,503.555 R80.2@807.217,506.095 R78.2@807.217,508.635 R76.2@807.217,511.175 R74.2@807.217,513.715 R72.2@807.217,516.255 R70.2@807.217,518.795 R68.2@807.217,521.335 R66.2@807.217,523.875 R64.2@807.217,526.415 R62.2@807.217,528.955 R60.2@807.217,531.495 R58.2@807.217,534.035 R56.2@807.217,536.575 R54.2@807.217,539.115 R52.2@807.217,541.655 ; H15.2@810.889,430.536 812.279,431.927 848.868,431.927 H16.2@850.259,430.536 ; v1(841.248,483.87) M12.6@841.248,487.708 ; v1(841.248,496.062) 841.248,496.189 841.184,496.252 841.248,496.316 M11.6@841.248,502.313 ; v1(841.248,527.685) M8.6@841.248,531.523 ; v1(841.248,539.877) 841.248,540.004 841.184,540.067 841.248,540.131 M7.6@841.248,546.128 ; v1(859.663,504.825) M10.6@859.663,508.663 ; v1(859.663,517.017) 859.663,517.144 859.599,517.207 859.663,517.271 M9.6@859.663,523.268 ; U55.12@864.842,478.409 868.553,478.409 870.331,480.187 870.331,484.632 871.728,486.029 U55.19@873.756,486.029 ; v1(869.95,542.29) 869.95,540.774 873.879,540.774 874.649,540.004 874.649,536.71 ; U54.5@870.204,536.71 874.649,536.71 ; U55.19@874.395,486.029 882.777,486.029 884.301,487.553 884.301,534.289 881.88,536.71 874.649,536.71
  Top Layer w0.508: R51.2@781.873,541.655 794.639,541.655 ; R52.2@807.217,541.655 794.639,541.655 ; v1(827.659,548.513) 825.754,546.608 825.754,544.576 824.738,543.56 795.655,543.56 794.639,542.544 794.639,541.655
  Bottom Layer w0.254: H31.6@684.403,577.596 H31.8@686.943,577.596 H31.10@689.483,577.596 708.648,596.761 724.809,596.761 725.94,595.63 H11.2@726.441,595.63 ; v1(685.165,464.693) 685.165,518.795 U50.20@694.436,528.066 696.722,525.78 696.722,507.492 697.738,506.476 702.183,506.476 v1(710.946,515.239) 716.026,520.319 v1(718.566,520.319) 718.566,506.476 713.994,501.904 ; S5.1@691.229,562.61 692.404,561.435 v1(692.404,545.846) ; v1(710.938,501.904) 713.994,501.904 ; v1(728.789,497.142) 727.075,495.427 v1(727.075,494.03) 721.868,494.03 713.994,501.904 ; v1(747.268,483.997) v1(747.268,495.427) 747.268,497.249 746.21,498.306 741.003,498.306 738.632,500.678 738.632,513.469 736.608,515.493 734.504,515.493 733.016,514.005 733.016,506.531 731.437,504.952 v1(728.853,504.952) v1(728.853,516.382) 728.853,518.16 729.488,518.795 750.991,518.795 753.745,521.549 753.745,525.098 751.92,526.923 748.665,526.923 747.776,527.812 v1(747.268,527.812) v1(747.268,539.242) ; H14.2@770.884,430.536 772.287,431.94 777.1,431.94 778.504,430.536 H15.2@810.889,430.536 ; v1(841.248,483.87) v1(841.248,496.062) 841.248,497.586 840.486,498.348 838.788,498.348 836.756,496.316 833.457,496.316 831.342,498.431 831.342,506.095 842.391,517.144 851.317,517.144 855.345,513.116 855.345,513.08 855.726,512.699 855.726,505.714 856.615,504.825 v1(859.663,504.825) v1(859.663,517.017) 859.663,518.668 859.028,519.303 857.972,519.303 857.591,518.922 838.073,518.922 835.942,521.053 835.942,522.954 835.914,522.982 835.914,526.288 837.311,527.685 v1(841.248,527.685) v1(841.248,539.877) ; v1@841.248,540.131 v1(841.248,539.877) ; H16.2@850.259,430.536 851.668,431.945 862.475,431.945 ; v1(869.95,542.29) 842.097,542.29 841.502,541.695 841.502,540.131 v1(841.248,539.877)
  Bottom Layer w0.508: S2.1@674.751,562.61 670.56,558.419 670.56,525.907 663.956,519.303 663.956,453.009 690.245,426.72 767.067,426.72 H14.2@770.884,430.536 ; H13.2@812.8,595.63 837.565,595.63 869.95,563.245 869.95,551.942 ; v1(827.659,548.513) 831.088,551.942 869.95,551.942 ; 862.475,431.945 885.698,455.168 885.698,535.305 878.713,542.29 v1(869.95,542.29) 869.95,551.942
IN1: H1.1 H21.1 | length 20.1
  Top Layer w0.508: H21.1@750.571,560.07 764.16,546.481 H1.1@765.048,546.481
IN2: H1.2 H21.2 | length 23.7
  Top Layer w0.508: H21.2@750.571,562.61 751.459,562.61 H1.2@767.588,546.481
IN3: H1.3 H21.3 | length 27.3
  Top Layer w0.508: H21.3@750.571,565.15 751.459,565.15 H1.3@770.128,546.481
IN4: H1.4 H21.4 | length 30.9
  Top Layer w0.508: H21.4@750.571,567.69 769.875,548.386 770.763,548.386 H1.4@772.668,546.481
IN5: H1.5 H21.5 | length 34.5
  Top Layer w0.508: H21.5@750.571,570.23 770.51,550.291 771.398,550.291 H1.5@775.208,546.481
IN6: H1.6 H21.6 | length 38.9
  Top Layer w0.508: H21.6@750.571,572.77 759.079,564.262 759.079,562.8 769.81,552.069 772.16,552.069 H1.6@777.748,546.481
IN7: H1.7 H21.7 | length 43.4
  Top Layer w0.508: H21.7@750.571,575.31 759.841,566.04 759.841,563.115 769.744,553.212 773.557,553.212 H1.7@780.288,546.481
IN8: H1.8 H21.8 | length 47.8
  Top Layer w0.508: H21.8@750.571,577.85 760.73,567.691 760.73,563.304 769.679,554.355 774.954,554.355 H1.8@782.828,546.481